# EAGLE board Awesome-Shield-0.50-0.51-Panelized-3x2 (EAGLE 7.2.0)
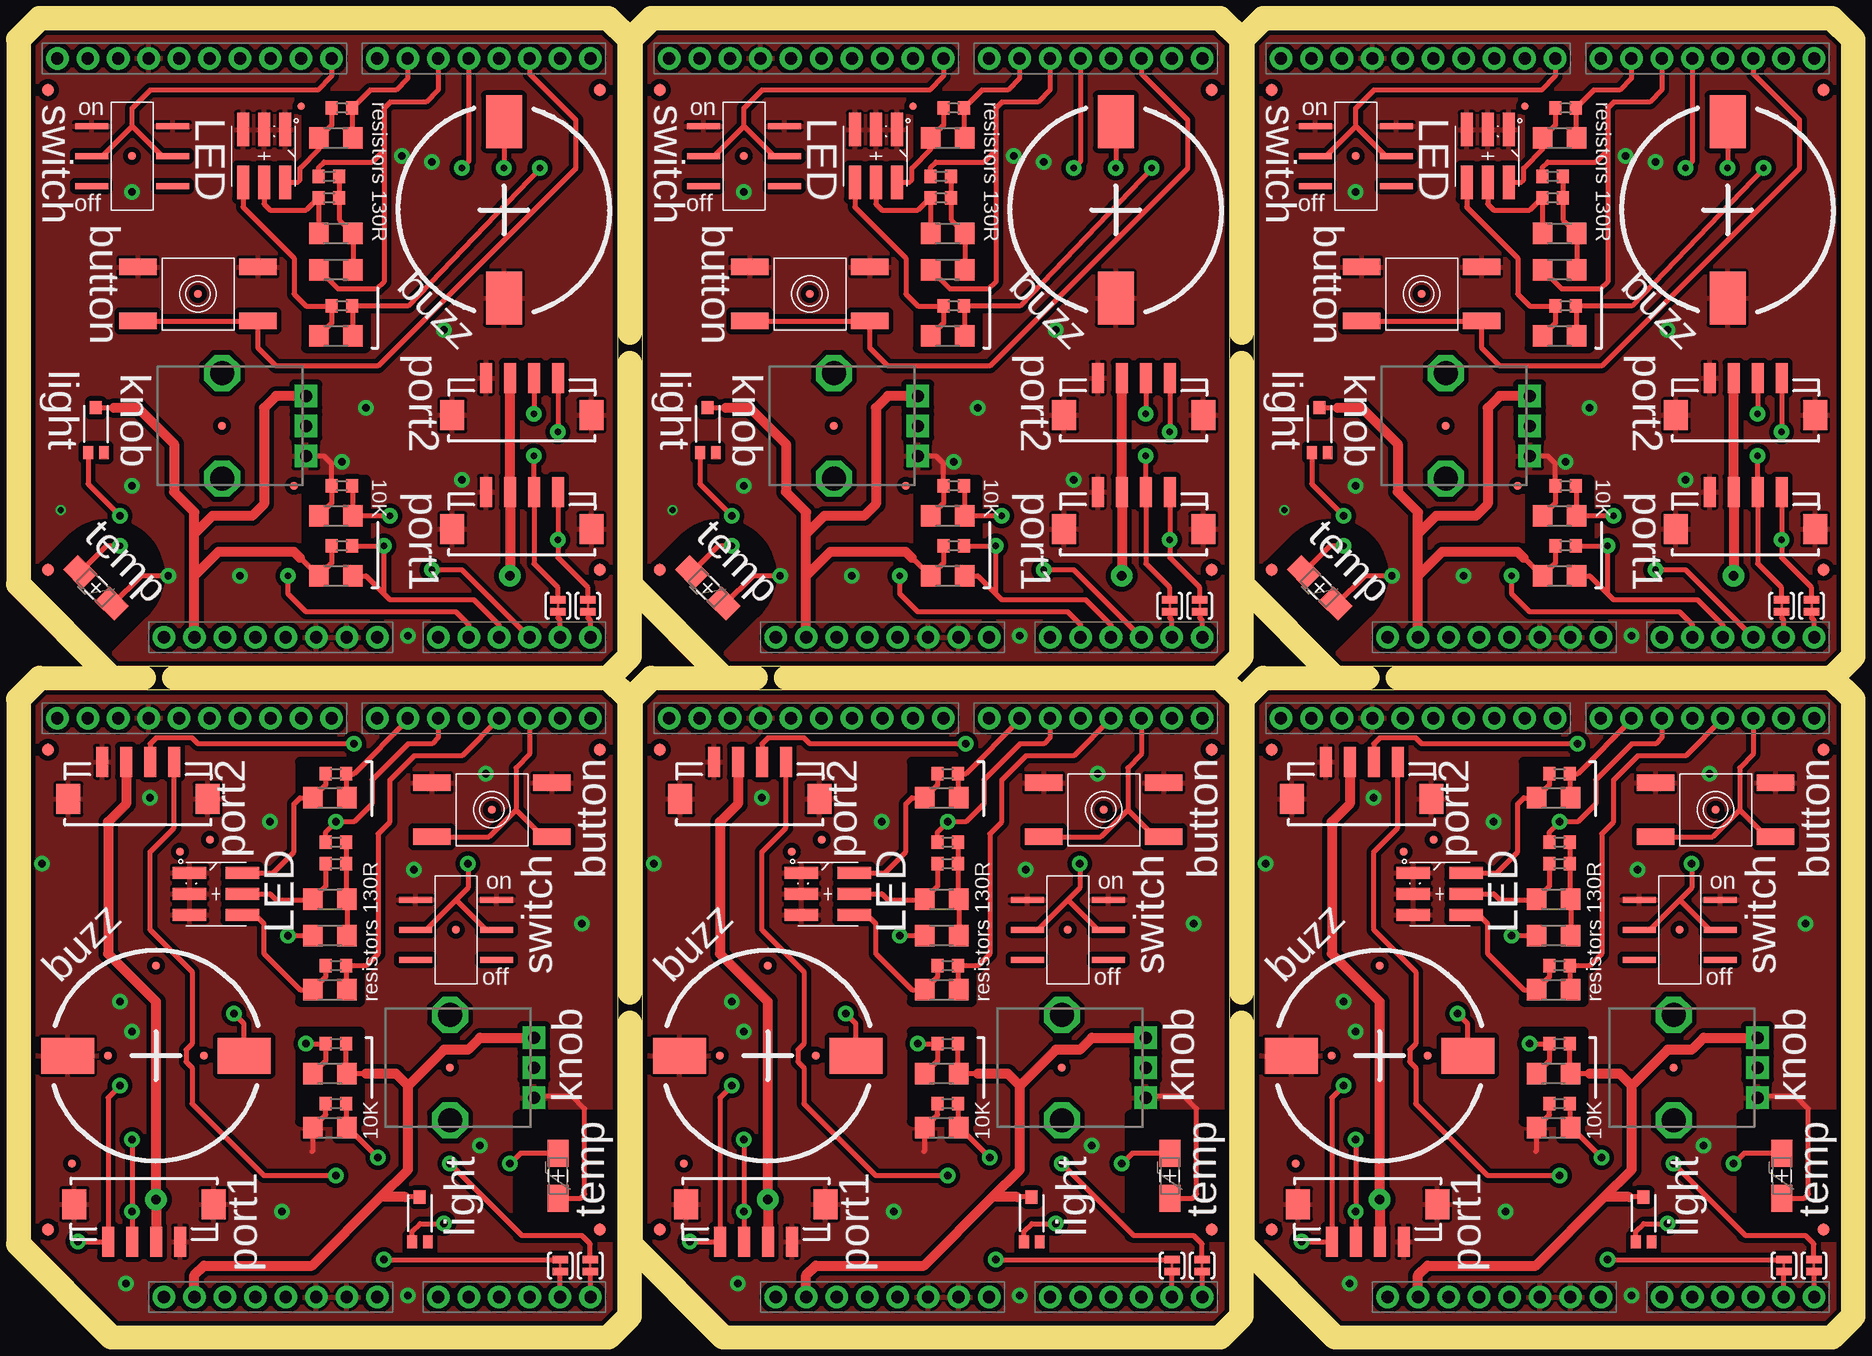
[diagram p0: board, top side]
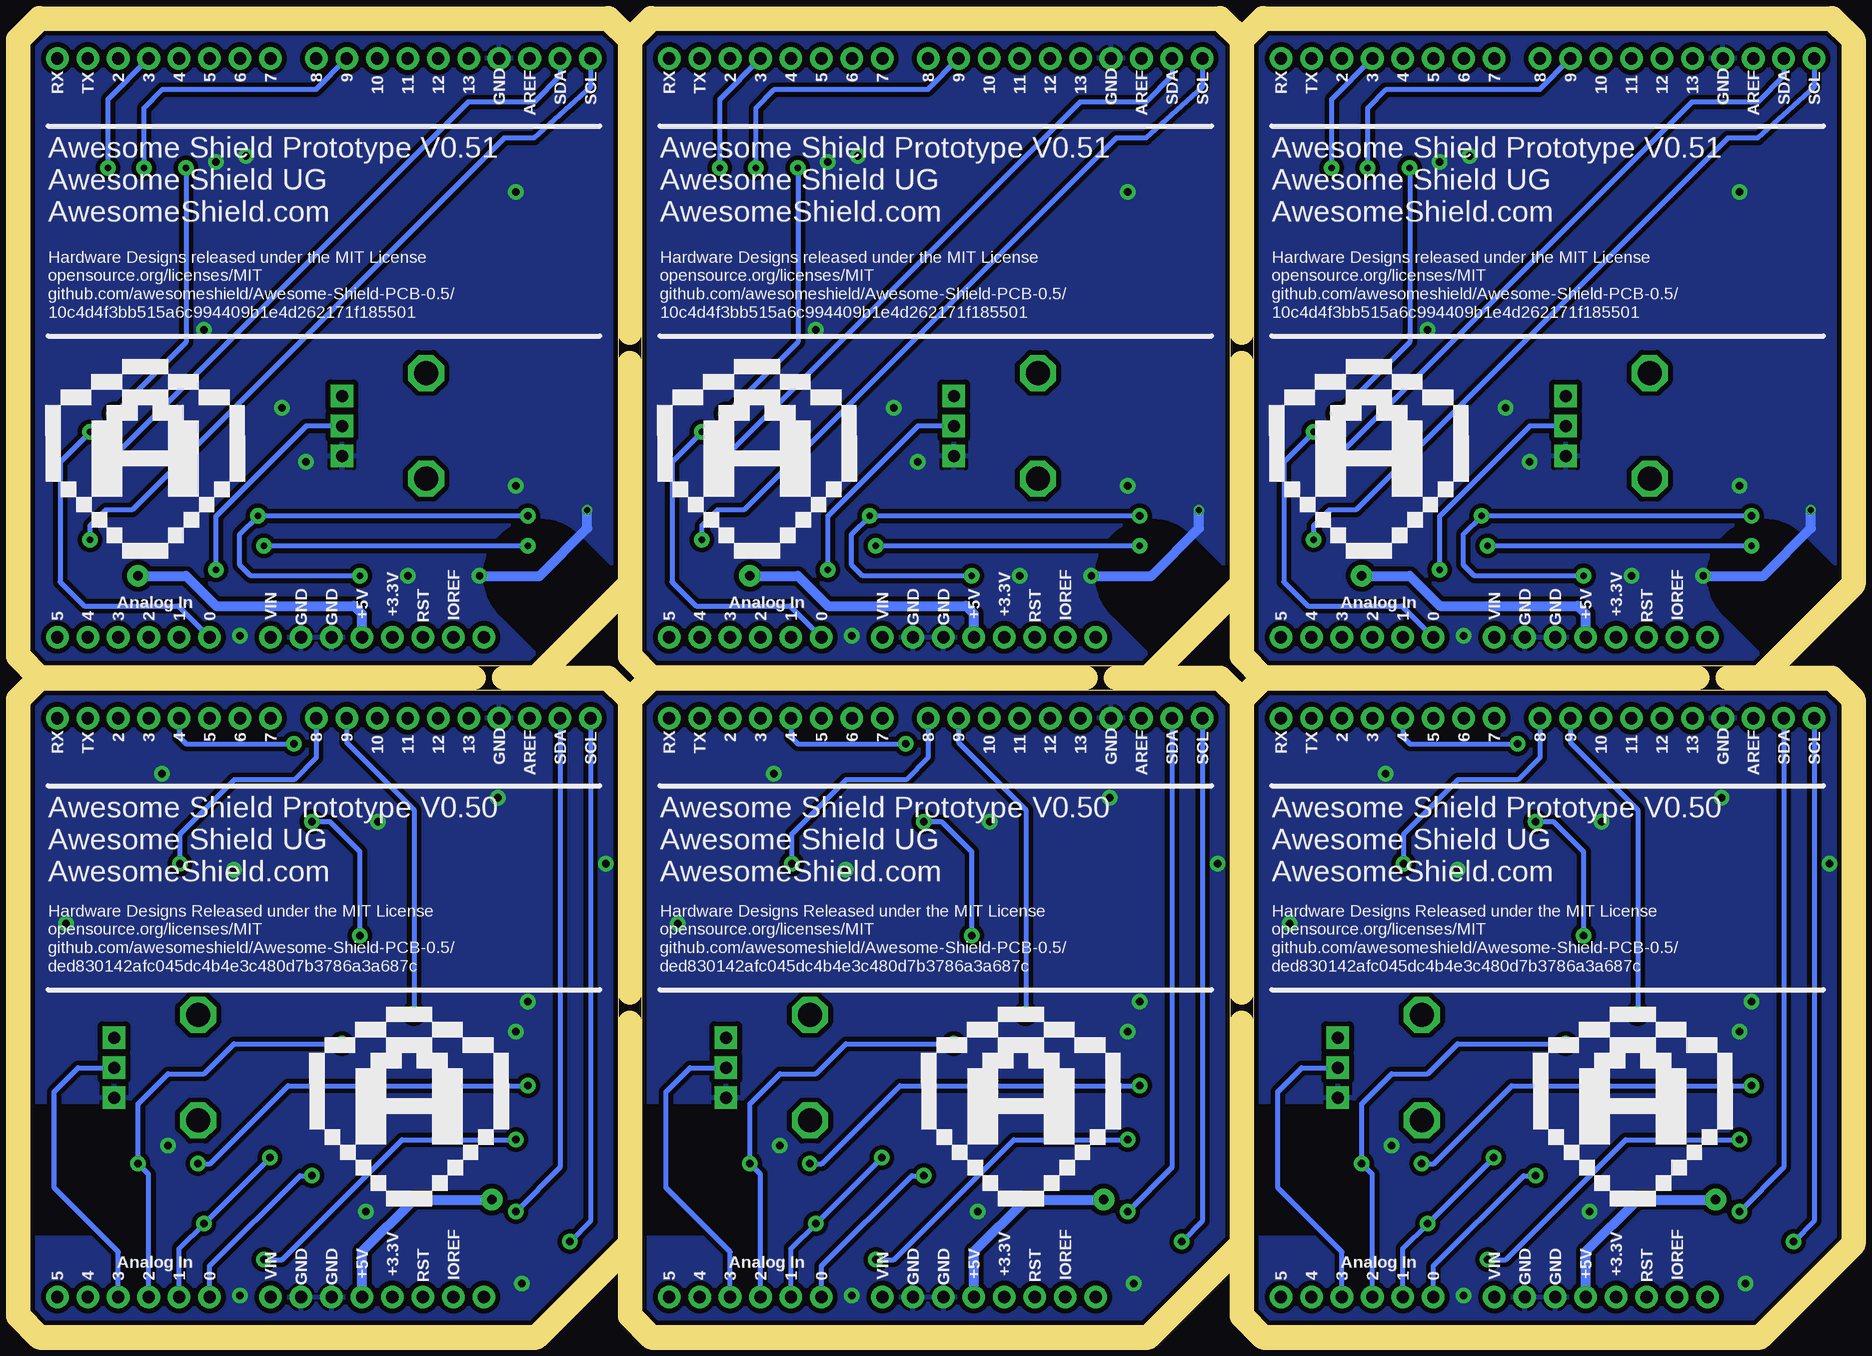
[diagram p1: board, bottom side, seen from below]

Size 151 x 108 mm. Coordinates in mm from the lower left corner, seen from the top.
Outline: 1.2,53 0,51.8 0,7.2 7.2,0 47.8,0 49,1.2 49,51.8 47.8,53 1.2,53
Outline: 103.2,53 102,51.8 102,7.2 109.2,0 149.8,0 151,1.2 151,51.8 149.8,53 103.2,53
Outline: 52.2,53 51,51.8 51,7.2 58.2,0 98.8,0 100,1.2 100,51.8 98.8,53 52.2,53
Outline: 1.2,108 0,106.8 0,62.2 7.2,55 47.8,55 49,56.2 49,106.8 47.8,108 1.2,108
Outline: 52.2,108 51,106.8 51,62.2 58.2,55 98.8,55 100,56.2 100,106.8 98.8,108 52.2,108
Outline: 103.2,108 102,106.8 102,62.2 109.2,55 149.8,55 151,56.2 151,106.8 149.8,108 103.2,108
Copper layers (1*16): Top 0.035mm / dielectric 1.5mm / Bottom 0.035mm
Design rules "SeeedStudio_2layer_DRU_no_angle_20140221": minimum track width 6mil, minimum drill 12mil, track to track 6mil, track to pad 6mil, pad to pad 6mil, via to via 6mil, smd to smd 0mil, copper to edge 10mil, drill to drill 10mil, minimum pad ring 10mil, minimum via ring 6mil, stop-mask expansion 2mil, vias tented up to drill 100mil, thermal gap 10mil
Net classes: 0 default: width 0.203 mm, drill 0.305 mm, clearance 0.152 mm
tRestrict: area 22.5,27 to 27.5,47; area 22.5,17 to 27.5,24.5; area 40.7,7.4 to 48.8,17.6; area 124.5,27 to 129.5,47; area 124.5,17 to 129.5,24.5; area 142.7,7.4 to 150.8,17.6; area 73.5,27 to 78.5,47; area 73.5,17 to 78.5,24.5; area 91.7,7.4 to 99.8,17.6; area 23,81.5 to 28,102.5; area 23,61.5 to 28,70.5; area 0.3,56.3 to 10.6,66.7; 6 more areas
bRestrict: area 42.2,7.9 to 48.8,18.1; area 144.2,7.9 to 150.8,18.1; area 93.2,7.9 to 99.8,18.1; area 0.3,56.3 to 10.6,66.7; area 51.3,56.3 to 61.6,66.7; area 102.3,56.3 to 112.6,66.7
Milling: 55 lines

## Footprints (pad centres in the part's own frame; a part is rotated, then mirrored left to right if it is on the bottom)
PTC-1206 = smd 2.25 x 1.75: 1 -1.875,0; 2 1.875,0
FIDUCIAL-1X2 = smd 1 x 1: 1 0,0
MICRO-FIDUCIAL = smd 0.635 x 0.635: 1 0,0
HW4-SMD-2.0 = smd 1 x 2.5: 1 -3,0; 2 -1,0; 3 1,0; 4 3,0 | smd 2 x 2.5: SS1 -5.8,3.123; SS2 5.8,3.123
UNO_R3_SHIELD = drill 1.016 pad 1.88: 3.3V 50.8,26.67; 5V 50.8,29.21; A0 50.8,41.91; A1 50.8,44.45; A2 50.8,46.99; A3 50.8,49.53; A4 50.8,52.07; A5 50.8,54.61; AREF 2.54,15.24; D2 2.54,49.53; D3 2.54,46.99; D4 2.54,44.45; D5 2.54,41.91; D6 2.54,39.37; D7 2.54,36.83; D8 2.54,33.02; D9 2.54,30.48; D10 2.54,27.94; D11 2.54,25.4; D12 2.54,22.86; D13 2.54,20.32; GND@0 50.8,31.75; GND@1 50.8,34.29; GND@2 2.54,17.78; IOREF 50.8,21.59; NC 50.8,19.05; RES 50.8,24.13; RX 2.54,54.61; SCL 2.54,10.16; SDA 2.54,12.7; TX 2.54,52.07; VIN 50.8,36.83
RGBLED5050 = smd 2.8 x 1: 1 -2.2,1.75; 2 -2.2,0; 3 -2.2,-1.75; 4 2.2,-1.75; 5 2.2,0; 6 2.2,1.75
R1206 = smd 1.6 x 1.803: 1 -1.422,0; 2 1.422,0
R0603 = smd 1 x 1.1: 1 -0.85,0; 2 0.85,0
ALPS_POT = drill 1 pad 1.88 square: P$1 7,-2.5; P$2 7,0; P$3 7,2.5 | drill 2 octagon: P$4 0,-4.4; P$5 0,4.4
AYZ0202 = smd 0.5 x 2.75: 1 -2.5,3.375; 2 0,3.375; 3 2.5,3.375; 4 -2.5,-3.375; 5 0,-3.375; 6 2.5,-3.375
BUZZER-CCV = smd 4.4 x 3: + 7.35,0; - -7.35,0
PAD-JUMPER-2-NC_BY_TRACE_YES_SILK = smd 0.635 x 1.27: 1 -0.508,0; 2 0.508,0
EVQ-Q2 = smd 3.1 x 1.4: A -5,-2.25; A' 5,-2.25; B -5,2.25; B' 5,2.25
TEMT6000-SEN = smd 1.1 x 0.8: BASE -1.87,-0.65; EMITTER -1.87,0.65 | smd 1.1 x 1: COLLECTOR 1.86,0.01

## Placement (x,y rotation side)
F1  PTCTHERMISTOR1206  [PTC-1206]  44,12.5 90 top
F2  PTCTHERMISTOR1206  [PTC-1206]  146,12.5 90 top
F3  PTCTHERMISTOR1206  [PTC-1206]  95,12.5 90 top
F4  PTCTHERMISTOR1206  [PTC-1206]  5.5,61.5 135 top
F5  PTCTHERMISTOR1206  [PTC-1206]  56.5,61.5 135 top
F6  PTCTHERMISTOR1206  [PTC-1206]  107.5,61.5 135 top
FID1  FIDUCIAL1X2  [FIDUCIAL-1X2]  1.5,8 0 top
FID2  FIDUCIAL1X2  [FIDUCIAL-1X2]  47.5,48 0 top
FID3  FIDUCIAL1X2  [FIDUCIAL-1X2]  47.5,8 0 top
FID4  FIDUCIAL1X2  [FIDUCIAL-1X2]  1.5,48 0 top
FID5  FIDUCIALUFIDUCIAL  [MICRO-FIDUCIAL]  3.5,13.5 0 top
FID6  FIDUCIALUFIDUCIAL  [MICRO-FIDUCIAL]  12.5,39.5 0 top
FID7  FIDUCIALUFIDUCIAL  [MICRO-FIDUCIAL]  38.5,43 0 top
FID8  FIDUCIALUFIDUCIAL  [MICRO-FIDUCIAL]  14.5,22.5 0 top
FID9  FIDUCIALUFIDUCIAL  [MICRO-FIDUCIAL]  10.5,30 0 top
FID10  FIDUCIALUFIDUCIAL  [MICRO-FIDUCIAL]  6.5,22.5 0 top
FID11  FIDUCIALUFIDUCIAL  [MICRO-FIDUCIAL]  35,21.5 0 top
FID12  FIDUCIAL1X2  [FIDUCIAL-1X2]  103.5,8 0 top
FID13  FIDUCIALUFIDUCIAL  [MICRO-FIDUCIAL]  35.5,33 0 top
FID14  FIDUCIAL1X2  [FIDUCIAL-1X2]  149.5,48 0 top
FID15  FIDUCIALUFIDUCIAL  [MICRO-FIDUCIAL]  15,40.5 0 top
FID16  FIDUCIAL1X2  [FIDUCIAL-1X2]  149.5,8 0 top
FID17  FIDUCIAL1X2  [FIDUCIAL-1X2]  103.5,48 0 top
FID18  FIDUCIALUFIDUCIAL  [MICRO-FIDUCIAL]  105.5,13.5 0 top
FID19  FIDUCIALUFIDUCIAL  [MICRO-FIDUCIAL]  114.5,39.5 0 top
FID20  FIDUCIALUFIDUCIAL  [MICRO-FIDUCIAL]  140.5,43 0 top
FID21  FIDUCIALUFIDUCIAL  [MICRO-FIDUCIAL]  116.5,22.5 0 top
FID22  FIDUCIALUFIDUCIAL  [MICRO-FIDUCIAL]  112.5,30 0 top
FID23  FIDUCIALUFIDUCIAL  [MICRO-FIDUCIAL]  108.5,22.5 0 top
FID24  FIDUCIALUFIDUCIAL  [MICRO-FIDUCIAL]  137,21.5 0 top
FID25  FIDUCIALUFIDUCIAL  [MICRO-FIDUCIAL]  137.5,33 0 top
FID26  FIDUCIALUFIDUCIAL  [MICRO-FIDUCIAL]  117,40.5 0 top
FID27  FIDUCIAL1X2  [FIDUCIAL-1X2]  52.5,8 0 top
FID28  FIDUCIAL1X2  [FIDUCIAL-1X2]  98.5,48 0 top
FID29  FIDUCIAL1X2  [FIDUCIAL-1X2]  98.5,8 0 top
FID30  FIDUCIAL1X2  [FIDUCIAL-1X2]  52.5,48 0 top
FID31  FIDUCIALUFIDUCIAL  [MICRO-FIDUCIAL]  54.5,13.5 0 top
FID32  FIDUCIALUFIDUCIAL  [MICRO-FIDUCIAL]  63.5,39.5 0 top
FID33  FIDUCIALUFIDUCIAL  [MICRO-FIDUCIAL]  89.5,43 0 top
FID34  FIDUCIALUFIDUCIAL  [MICRO-FIDUCIAL]  65.5,22.5 0 top
FID35  FIDUCIALUFIDUCIAL  [MICRO-FIDUCIAL]  61.5,30 0 top
FID36  FIDUCIALUFIDUCIAL  [MICRO-FIDUCIAL]  57.5,22.5 0 top
FID37  FIDUCIALUFIDUCIAL  [MICRO-FIDUCIAL]  86,21.5 0 top
FID38  FIDUCIALUFIDUCIAL  [MICRO-FIDUCIAL]  86.5,33 0 top
FID39  FIDUCIALUFIDUCIAL  [MICRO-FIDUCIAL]  66,40.5 0 top
FID40  FIDUCIAL1X2  [FIDUCIAL-1X2]  1.5,63 0 top
FID41  FIDUCIAL1X2  [FIDUCIAL-1X2]  47.5,103 0 top
FID42  FIDUCIAL1X2  [FIDUCIAL-1X2]  47.5,63 0 top
FID43  FIDUCIAL1X2  [FIDUCIAL-1X2]  1.5,103 0 top
FID44  FIDUCIALUFIDUCIAL  [MICRO-FIDUCIAL]  14,86 0 top
FID45  FIDUCIALUFIDUCIAL  [MICRO-FIDUCIAL]  8.5,97.5 0 top
FID46  FIDUCIALUFIDUCIAL  [MICRO-FIDUCIAL]  22.6,101.63 0 top
FID47  FIDUCIALUFIDUCIAL  [MICRO-FIDUCIAL]  22,70 0 top
FID48  FIDUCIALUFIDUCIAL  [MICRO-FIDUCIAL]  16,75 0 top
FID49  FIDUCIAL1X2  [FIDUCIAL-1X2]  52.5,63 0 top
FID50  FIDUCIAL1X2  [FIDUCIAL-1X2]  98.5,103 0 top
FID51  FIDUCIAL1X2  [FIDUCIAL-1X2]  98.5,63 0 top
FID52  FIDUCIAL1X2  [FIDUCIAL-1X2]  52.5,103 0 top
FID53  FIDUCIALUFIDUCIAL  [MICRO-FIDUCIAL]  65,86 0 top
FID54  FIDUCIALUFIDUCIAL  [MICRO-FIDUCIAL]  59.5,97.5 0 top
FID55  FIDUCIALUFIDUCIAL  [MICRO-FIDUCIAL]  73.6,101.63 0 top
FID56  FIDUCIALUFIDUCIAL  [MICRO-FIDUCIAL]  73,70 0 top
FID57  FIDUCIALUFIDUCIAL  [MICRO-FIDUCIAL]  67,75 0 top
FID58  FIDUCIAL1X2  [FIDUCIAL-1X2]  103.5,63 0 top
FID59  FIDUCIAL1X2  [FIDUCIAL-1X2]  149.5,103 0 top
FID60  FIDUCIAL1X2  [FIDUCIAL-1X2]  149.5,63 0 top
FID61  FIDUCIAL1X2  [FIDUCIAL-1X2]  103.5,103 0 top
FID62  FIDUCIALUFIDUCIAL  [MICRO-FIDUCIAL]  116,86 0 top
FID63  FIDUCIALUFIDUCIAL  [MICRO-FIDUCIAL]  110.5,97.5 0 top
FID64  FIDUCIALUFIDUCIAL  [MICRO-FIDUCIAL]  124.6,101.63 0 top
FID65  FIDUCIALUFIDUCIAL  [MICRO-FIDUCIAL]  124,70 0 top
FID66  FIDUCIALUFIDUCIAL  [MICRO-FIDUCIAL]  118,75 0 top
J1  [HW4-SMD-2.0]  111.5,7 0 top
J2  ARDUINO_R3_SHIELD  [UNO_R3_SHIELD]  -7.89,53.17 270 top
J3  [HW4-SMD-2.0]  9.5,7 0 top
J4  [HW4-SMD-2.0]  9,47 180 top
J5  [HW4-SMD-2.0]  111,47 180 top
J6  ARDUINO_R3_SHIELD  [UNO_R3_SHIELD]  94.11,53.17 270 top
J7  [HW4-SMD-2.0]  60.5,7 0 top
J8  [HW4-SMD-2.0]  60,47 180 top
J9  ARDUINO_R3_SHIELD  [UNO_R3_SHIELD]  43.11,53.17 270 top
J10  [HW4-SMD-2.0]  41,69.5 180 top
J11  [HW4-SMD-2.0]  41,79 180 top
J12  ARDUINO_R3_SHIELD  [UNO_R3_SHIELD]  -7.89,108.17 270 top
J13  [HW4-SMD-2.0]  92,69.5 180 top
J14  [HW4-SMD-2.0]  92,79 180 top
J15  ARDUINO_R3_SHIELD  [UNO_R3_SHIELD]  43.11,108.17 270 top
J16  [HW4-SMD-2.0]  143,69.5 180 top
J17  [HW4-SMD-2.0]  143,79 180 top
J18  ARDUINO_R3_SHIELD  [UNO_R3_SHIELD]  94.11,108.17 270 top
LED1  RGBLED5050  [RGBLED5050]  15.5,36 180 top
LED2  RGBLED5050  [RGBLED5050]  117.5,36 180 top
LED3  RGBLED5050  [RGBLED5050]  66.5,36 180 top
LED4  RGBLED5050  [RGBLED5050]  19.5,97.5 90 top
LED5  RGBLED5050  [RGBLED5050]  70.5,97.5 90 top
LED6  RGBLED5050  [RGBLED5050]  121.5,97.5 90 top
R1  130 Ohm  [R1206]  25,44 180 top
R2  130 Ohm  [R1206]  25,28 180 top
R3  130 Ohm  [R1206]  25,35.55 180 top
R4  130 Ohm  [R1206]  25,32.5 0 top
R5  130 Ohm  [R0603]  25.5,30 180 top
R6  10K  [R1206]  25,16.5 180 top
R7  10K Ohm  [R1206]  25,21 0 top
R8  130 Ohm  [R0603]  25.5,46 180 top
R9  130 Ohm  [R0603]  25.5,38.5 180 top
R10  130 Ohm  [R0603]  25.5,40.3 0 top
R11  10K  [R0603]  25.5,18.5 0 top
R12  10K Ohm  [R0603]  25.5,23.5 0 top
R13  130 Ohm  [R1206]  127,44 180 top
R14  130 Ohm  [R1206]  127,28 180 top
R15  130 Ohm  [R1206]  127,35.55 180 top
R16  10K  [R1206]  127,16.5 180 top
R17  10K Ohm  [R1206]  127,21 0 top
R18  130 Ohm  [R1206]  127,32.5 0 top
R19  130 Ohm  [R0603]  127.5,46 180 top
R20  130 Ohm  [R0603]  127.5,30 180 top
R21  130 Ohm  [R0603]  127.5,38.5 180 top
R22  130 Ohm  [R0603]  127.5,40.3 0 top
R23  10K  [R0603]  127.5,18.5 0 top
R24  10K Ohm  [R0603]  127.5,23.5 0 top
R25  130 Ohm  [R1206]  76,44 180 top
R26  130 Ohm  [R1206]  76,28 180 top
R27  130 Ohm  [R1206]  76,35.55 180 top
R28  10K  [R1206]  76,16.5 180 top
R29  10K Ohm  [R1206]  76,21 0 top
R30  130 Ohm  [R1206]  76,32.5 0 top
R31  130 Ohm  [R0603]  76.5,46 180 top
R32  130 Ohm  [R0603]  76.5,30 180 top
R33  130 Ohm  [R0603]  76.5,38.5 180 top
R34  130 Ohm  [R0603]  76.5,40.3 0 top
R35  10K  [R0603]  76.5,18.5 0 top
R36  10K Ohm  [R0603]  76.5,23.5 0 top
R37  130 Ohm  [R1206]  25.5,99 180 top
R38  130 Ohm  [R1206]  25.5,82.5 180 top
R39  130 Ohm  [R1206]  25.5,91.05 180 top
R40  10K  [R1206]  25.5,67.5 180 top
R41  10K Ohm  [R1206]  25.5,62.5 180 top
R42  130 Ohm  [R1206]  25.5,88 0 top
R43  130 Ohm  [R0603]  26,101.5 180 top
R44  130 Ohm  [R0603]  26,85 180 top
R45  130 Ohm  [R0603]  24.93,94 180 top
R46  130 Ohm  [R0603]  24.93,95.8 0 top
R47  10K  [R0603]  26,70 0 top
R48  10K Ohm  [R0603]  26,65 180 top
R49  130 Ohm  [R1206]  76.5,99 180 top
R50  130 Ohm  [R1206]  76.5,82.5 180 top
R51  130 Ohm  [R1206]  76.5,91.05 180 top
R52  10K  [R1206]  76.5,67.5 180 top
R53  10K Ohm  [R1206]  76.5,62.5 180 top
R54  130 Ohm  [R1206]  76.5,88 0 top
R55  130 Ohm  [R0603]  77,101.5 180 top
R56  130 Ohm  [R0603]  77,85 180 top
R57  130 Ohm  [R0603]  75.93,94 180 top
R58  130 Ohm  [R0603]  75.93,95.8 0 top
R59  10K  [R0603]  77,70 0 top
R60  10K Ohm  [R0603]  77,65 180 top
R61  130 Ohm  [R1206]  127.5,99 180 top
R62  130 Ohm  [R1206]  127.5,82.5 180 top
R63  130 Ohm  [R1206]  127.5,91.05 180 top
R64  10K  [R1206]  127.5,67.5 180 top
R65  10K Ohm  [R1206]  127.5,62.5 180 top
R66  130 Ohm  [R1206]  127.5,88 0 top
R67  130 Ohm  [R0603]  128,101.5 180 top
R68  130 Ohm  [R0603]  128,85 180 top
R69  130 Ohm  [R0603]  126.93,94 180 top
R70  130 Ohm  [R0603]  126.93,95.8 0 top
R71  10K  [R0603]  128,70 0 top
R72  10K Ohm  [R0603]  128,65 180 top
RV1  [ALPS_POT]  35,21.5 0 top
RV2  [ALPS_POT]  137,21.5 0 top
RV3  [ALPS_POT]  86,21.5 0 top
RV4  [ALPS_POT]  16,75 0 top
RV5  [ALPS_POT]  67,75 0 top
RV6  [ALPS_POT]  118,75 0 top
S1  DPDT  [AYZ0202]  137.5,33 90 top
S2  DPDT  [AYZ0202]  35.5,33 90 top
S3  DPDT  [AYZ0202]  86.5,33 90 top
S4  DPDT  [AYZ0202]  8.5,97.5 90 top
S5  DPDT  [AYZ0202]  59.5,97.5 90 top
S6  DPDT  [AYZ0202]  110.5,97.5 90 top
SG1  BUZZERSMD2  [BUZZER-CCV]  10.5,22.5 180 top
SG2  BUZZERSMD2  [BUZZER-CCV]  112.5,22.5 180 top
SG3  BUZZERSMD2  [BUZZER-CCV]  61.5,22.5 180 top
SG4  BUZZERSMD2  [BUZZER-CCV]  39.5,93 270 top
SG5  BUZZERSMD2  [BUZZER-CCV]  90.5,93 270 top
SG6  BUZZERSMD2  [BUZZER-CCV]  141.5,93 270 top
SJ1  JUMPER-PAD-2-NC_BY_TRACE  [PAD-JUMPER-2-NC_BY_TRACE_YES_SILK]  44.2,5 270 top
SJ2  JUMPER-PAD-2-NC_BY_TRACE  [PAD-JUMPER-2-NC_BY_TRACE_YES_SILK]  46.7,5 270 top
SJ3  JUMPER-PAD-2-NC_BY_TRACE  [PAD-JUMPER-2-NC_BY_TRACE_YES_SILK]  146.2,5 270 top
SJ4  JUMPER-PAD-2-NC_BY_TRACE  [PAD-JUMPER-2-NC_BY_TRACE_YES_SILK]  148.7,5 270 top
SJ5  JUMPER-PAD-2-NC_BY_TRACE  [PAD-JUMPER-2-NC_BY_TRACE_YES_SILK]  95.2,5 270 top
SJ6  JUMPER-PAD-2-NC_BY_TRACE  [PAD-JUMPER-2-NC_BY_TRACE_YES_SILK]  97.7,5 270 top
SJ7  JUMPER-PAD-2-NC_BY_TRACE  [PAD-JUMPER-2-NC_BY_TRACE_YES_SILK]  44,60 270 top
SJ8  JUMPER-PAD-2-NC_BY_TRACE  [PAD-JUMPER-2-NC_BY_TRACE_YES_SILK]  46.5,60 270 top
SJ9  JUMPER-PAD-2-NC_BY_TRACE  [PAD-JUMPER-2-NC_BY_TRACE_YES_SILK]  95,60 270 top
SJ10  JUMPER-PAD-2-NC_BY_TRACE  [PAD-JUMPER-2-NC_BY_TRACE_YES_SILK]  97.5,60 270 top
SJ11  JUMPER-PAD-2-NC_BY_TRACE  [PAD-JUMPER-2-NC_BY_TRACE_YES_SILK]  146,60 270 top
SJ12  JUMPER-PAD-2-NC_BY_TRACE  [PAD-JUMPER-2-NC_BY_TRACE_YES_SILK]  148.5,60 270 top
SW1  SPST_TACT-EVQQ2  [EVQ-Q2]  38.5,43 180 top
SW2  SPST_TACT-EVQQ2  [EVQ-Q2]  140.5,43 180 top
SW3  SPST_TACT-EVQQ2  [EVQ-Q2]  89.5,43 180 top
SW4  SPST_TACT-EVQQ2  [EVQ-Q2]  14,86 180 top
SW5  SPST_TACT-EVQQ2  [EVQ-Q2]  65,86 180 top
SW6  SPST_TACT-EVQQ2  [EVQ-Q2]  116,86 180 top
U1  LIGHTSENSORTEMT6000  [TEMT6000-SEN]  32.5,8.85 90 top
U2  LIGHTSENSORTEMT6000  [TEMT6000-SEN]  134.5,8.85 90 top
U3  LIGHTSENSORTEMT6000  [TEMT6000-SEN]  83.5,8.85 90 top
U4  LIGHTSENSORTEMT6000  [TEMT6000-SEN]  5.5,74.65 90 top
U5  LIGHTSENSORTEMT6000  [TEMT6000-SEN]  56.5,74.65 90 top
U6  LIGHTSENSORTEMT6000  [TEMT6000-SEN]  107.5,74.65 90 top

## Library data of the parts
F1-F6 = SparkFun-PowerIC; PROD_ID: RES-08585
FID1-FID66 = SparkFun-Aesthetics
J1 J3-J5 J7 J8 J10 J11 J13 J14 J16 J17 = Seeed-OPL-Connector
J2 J6 J9 J12 J15 J18 = SparkFun-Boards
LED1-LED6 SW1-SW6 = adafruit
R1-R72 = rcl
RV1-RV6 = SparkFun-Electromechanical; PROD_ID: RES-09177
S1-S6 = SparkFun-Electromechanical; PROD_ID: SWCH-08179
SG1-SG6 = SparkFun-Electromechanical
SJ1-SJ12 = SparkFun-Passives
U1-U6 = SparkFun-Sensors

## Nets
+3V1: J6.3.3V
+3V2: J9.3.3V
+3V3: J2.3.3V
+3V4: J12.3.3V
+3V5: J15.3.3V
+3V6: J18.3.3V
+5V: J2.5V J3.3 J4.3
+5V1: J1.3 J5.3 J6.5V
+5V2: J7.3 J8.3 J9.5V
+5V3: J10.3 J11.3 J12.5V
+5V4: J13.3 J14.3 J15.5V
+5V5: J16.3 J17.3 J18.5V
A0: J2.A0 J4.1
A1: J2.A1 R6.1 R11.2 U1.EMITTER
A2: F1.2 J2.A2 R7.1 R12.1
A3: J2.A3 RV1.P$2
A4: J2.A4 SJ1.2
A5: J2.A5 SJ2.2
A6: J6.A1 R16.1 R23.2 U2.EMITTER
A7: F2.2 J6.A2 R17.1 R24.1
A8: J5.1 J6.A0
A9: J6.A5 SJ4.2
A10: J6.A4 SJ3.2
A11: J6.A3 RV2.P$2
A12: J9.A1 R28.1 R35.2 U3.EMITTER
A13: F3.2 J9.A2 R29.1 R36.1
A14: J8.1 J9.A0
A15: J9.A5 SJ6.2
A16: J9.A4 SJ5.2
A17: J9.A3 RV3.P$2
A18: J12.A1 R40.1 R47.2 U4.EMITTER
A19: F4.2 J12.A2 R41.1 R48.1
A20: J11.1 J12.A0
A21: J12.A5 SJ8.2
A22: J12.A4 SJ7.2
A23: J12.A3 RV4.P$2
A24: J15.A1 R52.1 R59.2 U5.EMITTER
A25: F5.2 J15.A2 R53.1 R60.1
A26: J14.1 J15.A0
A27: J15.A5 SJ10.2
A28: J15.A4 SJ9.2
A29: J15.A3 RV5.P$2
A30: J18.A1 R64.1 R71.2 U6.EMITTER
A31: F6.2 J18.A2 R65.1 R72.1
A32: J17.1 J18.A0
A33: J18.A5 SJ12.2
A34: J18.A4 SJ11.2
A35: J18.A3 RV6.P$2
D1: J6.D2 SW2.B SW2.B'
D2: J2.D2 SW1.B SW1.B'
D3: J2.D3 R2.1 R5.1
D4: J2.D4 J4.2
D5: J2.D5 R4.1 R10.1
D6: J2.D6 R1.1 R8.1
D7: J6.D6 R13.1 R19.1
D8: J2.D8 S2.2 S2.5
D9: J2.D9 SG1.-
D10: J6.D8 S1.2 S1.5
D11: J6.D9 SG2.-
D12: J5.2 J6.D4
D13: J6.D5 R18.1 R22.1
D14: J6.D3 R14.1 R20.1
D15: J9.D2 SW3.B SW3.B'
D16: J9.D6 R25.1 R31.1
D17: J9.D8 S3.2 S3.5
D18: J9.D9 SG3.-
D19: J8.2 J9.D4
D20: J9.D5 R30.1 R34.1
D21: J9.D3 R26.1 R32.1
D22: J12.D2 SW4.B SW4.B'
D23: J12.D6 R37.1 R43.1
D24: J12.D8 S4.2 S4.5
D25: J12.D9 SG4.-
D26: J11.2 J12.D4
D27: J12.D5 R42.1 R46.1
D28: J12.D3 R38.1 R44.1
D29: J15.D2 SW5.B SW5.B'
D30: J15.D6 R49.1 R55.1
D31: J15.D8 S5.2 S5.5
D32: J15.D9 SG5.-
D33: J14.2 J15.D4
D34: J15.D5 R54.1 R58.1
D35: J15.D3 R50.1 R56.1
D36: J18.D2 SW6.B SW6.B'
D37: J18.D6 R61.1 R67.1
D38: J18.D8 S6.2 S6.5
D39: J18.D9 SG6.-
D40: J17.2 J18.D4
D41: J18.D5 R66.1 R70.1
D42: J18.D3 R62.1 R68.1
GND: F1.1 J2.GND@0 J2.GND@1 J2.GND@2 J3.4 J3.SS1 J3.SS2 J4.4 J4.SS1 J4.SS2 LED1.4 LED1.5 LED1.6 R6.2 R11.1 RV1.P$1 S2.3 S2.6 SG1.+ SW1.A SW1.A'
GND1: F2.1 J1.4 J1.SS1 J1.SS2 J5.4 J5.SS1 J5.SS2 J6.GND@0 J6.GND@1 J6.GND@2 LED2.4 LED2.5 LED2.6 R16.2 R23.1 RV2.P$1 S1.3 S1.6 SG2.+ SW2.A SW2.A'
GND2: F3.1 J7.4 J7.SS1 J7.SS2 J8.4 J8.SS1 J8.SS2 J9.GND@0 J9.GND@1 J9.GND@2 LED3.4 LED3.5 LED3.6 R28.2 R35.1 RV3.P$1 S3.3 S3.6 SG3.+ SW3.A SW3.A'
GND3: F4.1 J10.4 J10.SS1 J10.SS2 J11.4 J11.SS1 J11.SS2 J12.GND@0 J12.GND@1 J12.GND@2 LED4.4 LED4.5 LED4.6 R40.2 R47.1 RV4.P$1 S4.3 S4.6 SG4.+ SW4.A SW4.A'
GND4: F5.1 J13.4 J13.SS1 J13.SS2 J14.4 J14.SS1 J14.SS2 J15.GND@0 J15.GND@1 J15.GND@2 LED5.4 LED5.5 LED5.6 R52.2 R59.1 RV5.P$1 S5.3 S5.6 SG5.+ SW5.A SW5.A'
GND5: F6.1 J16.4 J16.SS1 J16.SS2 J17.4 J17.SS1 J17.SS2 J18.GND@0 J18.GND@1 J18.GND@2 LED6.4 LED6.5 LED6.6 R64.2 R71.1 RV6.P$1 S6.3 S6.6 SG6.+ SW6.A SW6.A'
IOREF: J2.IOREF R7.2 R12.2 RV1.P$3 U1.COLLECTOR
IOREF1: J6.IOREF R17.2 R24.2 RV2.P$3 U2.COLLECTOR
IOREF2: J9.IOREF R29.2 R36.2 RV3.P$3 U3.COLLECTOR
IOREF3: J12.IOREF R41.2 R48.2 RV4.P$3 U4.COLLECTOR
IOREF4: J15.IOREF R53.2 R60.2 RV5.P$3 U5.COLLECTOR
IOREF5: J18.IOREF R65.2 R72.2 RV6.P$3 U6.COLLECTOR
N$1: LED2.2 R15.2 R21.2
N$2: R3.1 R4.2 R9.1 R10.2
N$3: LED1.2 R3.2 R9.2
N$4: R15.1 R18.2 R21.1 R22.2
N$5: LED2.3 R13.2 R19.2
N$6: LED2.1 R14.2 R20.2
N$7: LED3.2 R27.2 R33.2
N$8: LED1.3 R1.2 R8.2
N$9: LED1.1 R2.2 R5.2
N$10: R27.1 R30.2 R33.1 R34.2
N$11: LED3.3 R25.2 R31.2
N$12: LED3.1 R26.2 R32.2
N$13: LED4.2 R39.2 R45.2
N$14: R39.1 R42.2 R45.1 R46.2
N$15: LED4.3 R37.2 R43.2
N$16: LED4.1 R38.2 R44.2
N$17: LED5.2 R51.2 R57.2
N$18: R51.1 R54.2 R57.1 R58.2
N$19: LED5.3 R49.2 R55.2
N$20: LED5.1 R50.2 R56.2
N$21: LED6.2 R63.2 R69.2
N$22: R63.1 R66.2 R69.1 R70.2
N$23: LED6.3 R61.2 R67.2
N$24: LED6.1 R62.2 R68.2
SCL: J2.SCL J3.1 SJ2.1
SCL1: J1.1 J6.SCL SJ4.1
SCL2: J7.1 J9.SCL SJ6.1
SCL3: J10.1 J12.SCL SJ8.1
SCL4: J13.1 J15.SCL SJ10.1
SCL5: J16.1 J18.SCL SJ12.1
SDA: J2.SDA J3.2 SJ1.1
SDA1: J1.2 J6.SDA SJ3.1
SDA2: J7.2 J9.SDA SJ5.1
SDA3: J10.2 J12.SDA SJ7.1
SDA4: J13.2 J15.SDA SJ9.1
SDA5: J16.2 J18.SDA SJ11.1

## Tracks (layer width: path | path; a pad name or v marks a point on that pad's centre or on a via)
+5V  (via drill 0.76 pad 1.78)
  Top 0.813: J3.3 v10.5,10.5 10.5,27 6.5,31 6.5,42 8,43.5 J4.3
  Bottom 0.813: J2.5V 21.33,6.18 17,10.5 v10.5,10.5
+5V1  (via drill 0.76 pad 1.78)
  Top 0.813: J1.3 v112.5,10.5 112.5,27 108.5,31 108.5,42 110,43.5 J5.3
  Bottom 0.813: J6.5V 123.32,6.18 119,10.5 v112.5,10.5
+5V2  (via drill 0.76 pad 1.78)
  Top 0.813: J7.3 v61.5,10.5 61.5,27 57.5,31 57.5,42 59,43.5 J8.3
  Bottom 0.813: J9.5V 72.33,6.18 68,10.5 v61.5,10.5
+5V3  (via drill 0.76 pad 1.78)
  Top 0.813: J11.3 J10.3 v40,62.5
  Bottom 0.813: v40,62.5 36,62.5 33.5,60 22,60 21.33,59.33 J12.5V
+5V4  (via drill 0.76 pad 1.78)
  Top 0.813: J14.3 J13.3 v91,62.5
  Bottom 0.813: v91,62.5 87,62.5 84.5,60 73,60 72.33,59.33 J15.5V
+5V5  (via drill 0.76 pad 1.78)
  Top 0.813: J17.3 J16.3 v142,62.5
  Bottom 0.813: v142,62.5 138,62.5 135.5,60 124,60 123.32,59.33 J18.5V
A0  (via drill 0.6 pad 1.27)
  Top 0.406: J4.1 12,41.5 10,39.5 10,33 13.5,29.5 13.5,23.5 13,23 13,22 13.5,21.5 13.5,18.5 19.5,12.5 v25.5,12.5
  Bottom 0.406: J2.A0 34.03,4.98 26.5,12.5 v25.5,12.5
A1  (via drill 0.6 pad 1.27)
  Top 0.406: R11.2 26.35,16.57 R6.1 26.5,16.5 v29,14 | U1.EMITTER 31.85,7.85 32.5,8.5 v34.5,8.5
  Bottom 0.406: J2.A1 36.56,6.43 v34.5,8.5 v29,14
A2  (via drill 0.6 pad 1.27)
  Top 0.406: F1.2 40.88,14.38 v40,13.5 | v23,23.5 R12.1 24.65,22.07 R7.1
  Bottom 0.406: v23,23.5 32,23.5 34.5,21 37.5,21 40,18.5 v40,13.5 39.11,12.61 J2.A2
A3
  Bottom 0.406: J2.A3 41.64,6.14 47,11.5 47,19.5 45,21.5 RV1.P$2
A4
  Top 0.406: J2.A4 44.19,4.48 SJ1.2
A5
  Top 0.406: J2.A5 46.72,4.47 SJ2.2
A6  (via drill 0.6 pad 1.27)
  Top 0.406: R23.2 128.35,16.57 R16.1 128.5,16.5 v131,14 | U2.EMITTER 133.85,7.85 134.5,8.5 v136.5,8.5
  Bottom 0.406: J6.A1 138.56,6.43 v136.5,8.5 v131,14
A7  (via drill 0.6 pad 1.27)
  Top 0.406: F2.2 142.88,14.38 v142,13.5 | v125,23.5 R24.1 126.65,22.07 R17.1
  Bottom 0.406: v125,23.5 134,23.5 136.5,21 139.5,21 142,18.5 v142,13.5 141.1,12.61 J6.A2
A8  (via drill 0.6 pad 1.27)
  Top 0.406: J5.1 114,41.5 112,39.5 112,33 115.5,29.5 115.5,23.5 115,23 115,22 115.5,21.5 115.5,18.5 121.5,12.5 v127.5,12.5
  Bottom 0.406: J6.A0 136.03,4.98 128.5,12.5 v127.5,12.5
A9
  Top 0.406: J6.A5 148.72,4.47 SJ4.2
A10
  Top 0.406: J6.A4 146.19,4.48 SJ3.2
A11
  Bottom 0.406: J6.A3 143.65,6.14 149,11.5 149,19.5 147,21.5 RV2.P$2
A12  (via drill 0.6 pad 1.27)
  Top 0.406: R35.2 77.35,16.57 R28.1 77.5,16.5 v80,14 | U3.EMITTER 82.85,7.85 83.5,8.5 v85.5,8.5
  Bottom 0.406: J9.A1 87.56,6.43 v85.5,8.5 v80,14
A13  (via drill 0.6 pad 1.27)
  Top 0.406: F3.2 91.88,14.38 v91,13.5 | v74,23.5 R36.1 75.65,22.07 R29.1
  Bottom 0.406: v74,23.5 83,23.5 85.5,21 88.5,21 91,18.5 v91,13.5 90.11,12.61 J9.A2
A14  (via drill 0.6 pad 1.27)
  Top 0.406: J8.1 63,41.5 61,39.5 61,33 64.5,29.5 64.5,23.5 64,23 64,22 64.5,21.5 64.5,18.5 70.5,12.5 v76.5,12.5
  Bottom 0.406: J9.A0 85.03,4.98 77.5,12.5 v76.5,12.5
A15
  Top 0.406: J9.A5 97.72,4.47 SJ6.2
A16
  Top 0.406: J9.A4 95.19,4.48 SJ5.2
A17
  Bottom 0.406: J9.A3 92.64,6.14 98,11.5 98,19.5 96,21.5 RV3.P$2
A18  (via drill 0.51 pad 1.27, 0.6 pad 1.27)
  Top 0.406: v21.5,62.5 21.5,61 23,59.5 35.5,59.5 36.56,58.44 J12.A1 | v7.5,67.5 4.85,70.15 U4.EMITTER | v30,67.5 R40.1 26.92,69.93 R47.2
  Bottom 0.406: v7.5,67.5 v30,67.5 31.51,65.99 31.51,63.42 30.59,62.5 v21.5,62.5
A19  (via drill 0.51 pad 1.27)
  Top 0.406: R41.1 28,62.5 29.5,61 | v7.5,65 6.35,65 F4.2 | 29.5,61 30,60.5 37,60.5 39.11,58.39 J12.A2 | 29.5,61 v29.5,65 R48.1
  Bottom 0.406: v7.5,65 v29.5,65
A20  (via drill 0.51 pad 1.27)
  Top 0.406: J11.1 v44,74.5
  Bottom 0.406: v44,74.5 46.5,72 46.5,62 44.5,60 36.66,60 J12.A0
A21
  Top 0.406: SJ8.2 46.5,59 46.72,58.78 J12.A5
A22
  Top 0.406: SJ7.2 44,59 44.19,58.81 J12.A4
A23  (via drill 0.51 pad 1.27)
  Top 0.406: J12.A3 36,63 v33.5,63
  Bottom 0.406: RV4.P$2 26,75 33.5,67.5 v33.5,63
A24  (via drill 0.51 pad 1.27, 0.6 pad 1.27)
  Top 0.406: v72.5,62.5 72.5,61 74,59.5 86.5,59.5 87.56,58.44 J15.A1 | v58.5,67.5 55.85,70.15 U5.EMITTER | v81,67.5 R52.1 77.92,69.93 R59.2
  Bottom 0.406: v58.5,67.5 v81,67.5 82.51,65.99 82.51,63.42 81.59,62.5 v72.5,62.5
A25  (via drill 0.51 pad 1.27)
  Top 0.406: R53.1 79,62.5 80.5,61 | v58.5,65 57.35,65 F5.2 | 80.5,61 81,60.5 88,60.5 90.11,58.39 J15.A2 | 80.5,61 v80.5,65 R60.1
  Bottom 0.406: v58.5,65 v80.5,65
A26  (via drill 0.51 pad 1.27)
  Top 0.406: J14.1 v95,74.5
  Bottom 0.406: v95,74.5 97.5,72 97.5,62 95.5,60 87.66,60 J15.A0
A27
  Top 0.406: SJ10.2 97.5,59 97.72,58.78 J15.A5
A28
  Top 0.406: SJ9.2 95,59 95.19,58.81 J15.A4
A29  (via drill 0.51 pad 1.27)
  Top 0.406: J15.A3 87,63 v84.5,63
  Bottom 0.406: RV5.P$2 77,75 84.5,67.5 v84.5,63
A30  (via drill 0.51 pad 1.27, 0.6 pad 1.27)
  Top 0.406: v123.5,62.5 123.5,61 125,59.5 137.5,59.5 138.56,58.44 J18.A1 | v109.5,67.5 106.85,70.15 U6.EMITTER | v132,67.5 R64.1 128.92,69.93 R71.2
  Bottom 0.406: v109.5,67.5 v132,67.5 133.51,65.99 133.51,63.42 132.59,62.5 v123.5,62.5
A31  (via drill 0.51 pad 1.27)
  Top 0.406: R65.1 130,62.5 131.5,61 | v109.5,65 108.35,65 F6.2 | 131.5,61 132,60.5 139,60.5 141.1,58.39 J18.A2 | 131.5,61 v131.5,65 R72.1
  Bottom 0.406: v109.5,65 v131.5,65
A32  (via drill 0.51 pad 1.27)
  Top 0.406: J17.1 v146,74.5
  Bottom 0.406: v146,74.5 148.5,72 148.5,62 146.5,60 138.66,60 J18.A0
A33
  Top 0.406: SJ12.2 148.5,59 148.72,58.78 J18.A5
A34
  Top 0.406: SJ11.2 146,59 146.19,58.81 J18.A4
A35  (via drill 0.51 pad 1.27)
  Top 0.406: J18.A3 138,63 v135.5,63
  Bottom 0.406: RV6.P$2 128,75 135.5,67.5 v135.5,63
D1
  Top 0.406: J6.D2 143.65,47.64 142.5,46.5 142.5,43 | 142.5,43 140.25,40.75 SW2.B' | SW2.B 144.75,40.75 142.5,43
D2
  Top 0.406: J2.D2 41.64,47.64 40.5,46.5 40.5,43 | 40.5,43 38.25,40.75 SW1.B' | SW1.B 42.75,40.75 40.5,43
D3
  Top 0.406: J2.D3 39.11,50.61 36,47.5 32,47.5 30,45.5 30,42 29,41 29,31 28,30 R5.1 26.35,28.07 R2.1
D4  (via drill 0.6 pad 1.27)
  Top 0.406: v27,48.5 14,48.5 13.5,49 10.5,49 10,48.5 J4.2
  Bottom 0.406: J2.D4 36.56,49.06 36,48.5 v27,48.5
D5  (via drill 0.6 pad 1.27)
  Top 0.406: R4.1 v21.5,32.5 | R10.1 24.65,41.15 v25.5,42 27,42 28.5,43.5 28.5,45.5 31.5,48.5 33.5,48.5 34.03,49.03 J2.D5
  Bottom 0.406: v21.5,32.5 21.5,39.5 24,42 v25.5,42
D6
  Top 0.406: R1.1 26.35,44.07 R8.1 27,46 31.48,50.48 J2.D6
D7
  Top 0.406: R13.1 128.35,44.07 R19.1 129,46 133.49,50.48 J6.D6
D8  (via drill 0.6 pad 1.27)
  Top 0.406: v36.5,38.5 36.5,36.5 35.5,35.5 | 35.5,35.5 33,33 S2.2 | S2.5 38,33 35.5,35.5
  Bottom 0.406: J2.D8 25.13,47.36 27,45.5 32,45.5 36.5,41 v36.5,38.5
D9  (via drill 0.6 pad 1.27)
  Top 0.406: SG1.- 17.85,25.15 v17,26
  Bottom 0.406: J2.D9 22.59,48.59 17,43 v17,26
D10  (via drill 0.6 pad 1.27)
  Top 0.406: v138.5,38.5 138.5,36.5 137.5,35.5 | 137.5,35.5 135,33 S1.2 | S1.5 140,33 137.5,35.5
  Bottom 0.406: J6.D8 127.13,47.36 129,45.5 134,45.5 138.5,41 v138.5,38.5
D11  (via drill 0.6 pad 1.27)
  Top 0.406: SG2.- 119.85,25.15 v119,26
  Bottom 0.406: J6.D9 124.59,48.59 119,43 v119,26
D12  (via drill 0.6 pad 1.27)
  Top 0.406: v129,48.5 116,48.5 115.5,49 112.5,49 112,48.5 J5.2
  Bottom 0.406: J6.D4 138.56,49.06 138,48.5 v129,48.5
D13  (via drill 0.6 pad 1.27)
  Top 0.406: R18.1 v123.5,32.5 | R22.1 126.65,41.15 v127.5,42 129,42 130.5,43.5 130.5,45.5 133.5,48.5 135.5,48.5 136.03,49.03 J6.D5
  Bottom 0.406: v123.5,32.5 123.5,39.5 126,42 v127.5,42
D14
  Top 0.406: J6.D3 141.1,50.61 138,47.5 134,47.5 132,45.5 132,42 131,41 131,31 130,30 R20.1 128.35,28.07 R14.1
D15
  Top 0.406: J9.D2 92.64,47.64 91.5,46.5 91.5,43 | 91.5,43 89.25,40.75 SW3.B' | SW3.B 93.75,40.75 91.5,43
D16
  Top 0.406: R25.1 77.35,44.07 R31.1 78,46 82.48,50.48 J9.D6
D17  (via drill 0.6 pad 1.27)
  Top 0.406: v87.5,38.5 87.5,36.5 86.5,35.5 | 86.5,35.5 84,33 S3.2 | S3.5 89,33 86.5,35.5
  Bottom 0.406: J9.D8 76.14,47.36 78,45.5 83,45.5 87.5,41 v87.5,38.5
D18  (via drill 0.6 pad 1.27)
  Top 0.406: SG3.- 68.85,25.15 v68,26
  Bottom 0.406: J9.D9 73.59,48.59 68,43 v68,26
D19  (via drill 0.6 pad 1.27)
  Top 0.406: v78,48.5 65,48.5 64.5,49 61.5,49 61,48.5 J8.2
  Bottom 0.406: J9.D4 87.56,49.06 87,48.5 v78,48.5
D20  (via drill 0.6 pad 1.27)
  Top 0.406: R30.1 v72.5,32.5 | R34.1 75.65,41.15 v76.5,42 78,42 79.5,43.5 79.5,45.5 82.5,48.5 84.5,48.5 85.03,49.03 J9.D5
  Bottom 0.406: v72.5,32.5 72.5,39.5 75,42 v76.5,42
D21
  Top 0.406: J9.D3 90.11,50.61 87,47.5 83,47.5 81,45.5 81,42 80,41 80,31 79,30 R32.1 77.35,28.07 R26.1
D22
  Top 0.406: SW4.B' SW4.B 19,81.5 20.5,80 29,80 45.5,96.5 45.5,100.5 41.64,104.36 J12.D2
D23
  Top 0.406: R37.1 26.85,99.07 R43.1 28.35,103 30.5,103 31.48,103.98 J12.D6
D24
  Top 0.406: S4.5 11,97.5 8.5,100 | 8.5,100 8.5,101.5 10,103 24,103 25.13,104.14 J12.D8 | 8.5,100 6,97.5 S4.2
D25  (via drill 0.51 pad 1.27)
  Top 0.406: SG4.- v39.5,96.5
  Bottom 0.406: J12.D9 25.19,103.04 37.96,103.04 39.5,101.5 v39.5,96.5
D26  (via drill 0.51 pad 1.27)
  Top 0.406: J11.2 v42,76 | J12.D4 36.56,97.06 v36,96.5
  Bottom 0.406: v42,76 36,82 v36,96.5
D27
  Top 0.406: 29.5,98 29.5,101.5 30,102 33,102 34.03,103.03 J12.D5 | 29.5,98 29.5,87 28.9,86.4 25.68,86.4 R42.1 | R46.1 24.08,96.58 24.5,97 28.5,97 29.5,98
D28  (via drill 0.51 pad 1.27)
  Top 0.406: 26.9,85.01 R44.1 | R38.1 26.92,84.93 R44.1 | v42.5,96.5 31.5,85 R44.1
  Bottom 0.406: v42.5,96.5 42.5,102.23 J12.D3
D29
  Top 0.406: SW5.B' SW5.B 70,81.5 71.5,80 80,80 96.5,96.5 96.5,100.5 92.64,104.36 J15.D2
D30
  Top 0.406: R49.1 77.85,99.07 R55.1 79.35,103 81.5,103 82.48,103.98 J15.D6
D31
  Top 0.406: S5.5 62,97.5 59.5,100 | 59.5,100 59.5,101.5 61,103 75,103 76.14,104.14 J15.D8 | 59.5,100 57,97.5 S5.2
D32  (via drill 0.51 pad 1.27)
  Top 0.406: SG5.- v90.5,96.5
  Bottom 0.406: J15.D9 76.19,103.04 88.96,103.04 90.5,101.5 v90.5,96.5
D33  (via drill 0.51 pad 1.27)
  Top 0.406: J14.2 v93,76 | J15.D4 87.56,97.06 v87,96.5
  Bottom 0.406: v93,76 87,82 v87,96.5
D34
  Top 0.406: 80.5,98 80.5,101.5 81,102 84,102 85.03,103.03 J15.D5 | 80.5,98 80.5,87 79.9,86.4 76.68,86.4 R54.1 | R58.1 75.08,96.58 75.5,97 79.5,97 80.5,98
D35  (via drill 0.51 pad 1.27)
  Top 0.406: 77.9,85.01 R56.1 | R50.1 77.92,84.93 R56.1 | v93.5,96.5 82.5,85 R56.1
  Bottom 0.406: v93.5,96.5 93.5,102.23 J15.D3
D36
  Top 0.406: SW6.B' SW6.B 121,81.5 122.5,80 131,80 147.5,96.5 147.5,100.5 143.65,104.36 J18.D2
D37
  Top 0.406: R61.1 128.85,99.07 R67.1 130.35,103 132.5,103 133.49,103.98 J18.D6
D38
  Top 0.406: S6.5 113,97.5 110.5,100 | 110.5,100 110.5,101.5 112,103 126,103 127.13,104.14 J18.D8 | 110.5,100 108,97.5 S6.2
D39  (via drill 0.51 pad 1.27)
  Top 0.406: SG6.- v141.5,96.5
  Bottom 0.406: J18.D9 127.19,103.04 139.96,103.04 141.5,101.5 v141.5,96.5
D40  (via drill 0.51 pad 1.27)
  Top 0.406: J17.2 v144,76 | J18.D4 138.56,97.06 v138,96.5
  Bottom 0.406: v144,76 138,82 v138,96.5
D41
  Top 0.406: 131.5,98 131.5,101.5 132,102 135,102 136.03,103.03 J18.D5 | 131.5,98 131.5,87 130.9,86.4 127.68,86.4 R66.1 | R70.1 126.08,96.58 126.5,97 130.5,97 131.5,98
D42  (via drill 0.51 pad 1.27)
  Top 0.406: 128.9,85.01 R68.1 | R62.1 128.92,84.93 R68.1 | v144.5,96.5 133.5,85 R68.1
  Bottom 0.406: v144.5,96.5 144.5,102.23 J18.D3
GND  (via drill 0.6 pad 1.27)
  Top 0.406: 23.5,14.5 23.58,14.58 R6.2 24.65,17.57 R11.1 | F1.1 45.91,10.62 46.24,10.96 46.24,18.07 45.22,19.08 42.18,19.08
  other vias: 8,3.5 8.5,24.5 20,42 46,33.5 10,44 7.5,27 37.5,15 32,38 38,46 21,9.5 1,38.5 31.5,2.5
  pour Top (isolate 0.406): 47.8,53.1 1.2,53 0,51.8 0,7.2 7.1,0 47.8,0 49,1.3 49.06,4.9 49.06,37.9 49,40.5 49,51.9
  pour Bottom (isolate 0.406): 1.2,53 0,51.8 0,7.2 7.2,0 47.8,0 49.1,1.4 49.06,3.88 49.06,36.88 49,41 49,51.9 47.8,53.1
GND1  (via drill 0.6 pad 1.27)
  Top 0.406: 125.5,14.5 125.58,14.58 R16.2 126.65,17.57 R23.1 | F2.1 147.91,10.62 148.24,10.96 148.24,18.07 147.22,19.08 144.18,19.08
  other vias: 110,3.5 110.5,24.5 122,42 148,33.5 112,44 109.5,27 139.5,15 134,38 140,46 123,9.5 103,38.5 133.5,2.5
  pour Top (isolate 0.406): 149.8,53.1 103.2,53 102,51.8 102,7.2 109.1,0 149.8,0 151,1.3 151.06,4.9 151.06,37.9 151,40.5 151,51.9
  pour Bottom (isolate 0.406): 103.2,53 102,51.8 102,7.2 109.2,0 149.8,0 151.1,1.4 151.06,3.88 151.06,36.88 151,41 151,51.9 149.8,53.1
GND2  (via drill 0.6 pad 1.27)
  Top 0.406: 74.5,14.5 74.58,14.58 R28.2 75.65,17.57 R35.1 | F3.1 96.91,10.62 97.24,10.96 97.24,18.07 96.22,19.08 93.18,19.08
  other vias: 59,3.5 59.5,24.5 71,42 97,33.5 61,44 58.5,27 88.5,15 83,38 89,46 72,9.5 52,38.5 82.5,2.5
  pour Top (isolate 0.406): 98.8,53.1 52.2,53 51,51.8 51,7.2 58.1,0 98.8,0 100,1.3 100.06,4.9 100.06,37.9 100,40.5 100,51.9
  pour Bottom (isolate 0.406): 52.2,53 51,51.8 51,7.2 58.2,0 98.8,0 100.1,1.4 100.06,3.88 100.06,36.88 100,41 100,51.9 98.8,53.1
GND3  (via drill 0.51, 0.6 pad 1.27)
  Top 0.406: R40.2 25.15,68.57 R47.1 25.15,71.85 24.5,72.5 RV4.P$1 | F4.1 6.93,60.17 9.26,62.5 v11.53,62.5
  Bottom 0.813: v11.53,62.5 6.52,62.5 2.55,66.46 v2.55,67.99
  other vias: 33.5,97 34.5,83 36,70.5 31.5,57.5 8.5,70 31,97.5 8.5,94.5 17.5,62.5 28,76.5 26,72
  pour Top (isolate 0.406): 47.8,108.1 1.2,108 0,106.8 -0.1,62.3 7.2,55 47.8,55 49,56.2 49.06,59.9 49.06,92.9 49,95.5 49,106.9
  pour Bottom (isolate 0.406): 1.2,108 0,106.8 0,62.2 7.2,55 47.8,55 49,56.2 48.96,59.18 49.06,91.88 49,95.5 49,106.9 47.8,108
GND4  (via drill 0.51, 0.6 pad 1.27)
  Top 0.406: R52.2 76.15,68.57 R59.1 76.15,71.85 75.5,72.5 RV5.P$1 | F5.1 57.93,60.17 60.26,62.5 v62.53,62.5
  Bottom 0.813: v62.53,62.5 57.52,62.5 53.55,66.46 v53.55,67.99
  other vias: 84.5,97 85.5,83 87,70.5 82.5,57.5 59.5,70 82,97.5 59.5,94.5 68.5,62.5 79,76.5 77,72
  pour Top (isolate 0.406): 98.8,108.1 52.2,108 51,106.8 50.9,62.3 58.2,55 98.8,55 100,56.2 100.06,59.9 100.06,92.9 100,95.5 100,106.9
  pour Bottom (isolate 0.406): 52.2,108 51,106.8 51,62.2 58.2,55 98.8,55 100,56.2 99.96,59.18 100.06,91.88 100,95.5 100,106.9 98.8,108
GND5  (via drill 0.51, 0.6 pad 1.27)
  Top 0.406: R64.2 127.15,68.57 R71.1 127.15,71.85 126.5,72.5 RV6.P$1 | F6.1 108.93,60.17 111.26,62.5 v113.53,62.5
  Bottom 0.813: v113.53,62.5 108.52,62.5 104.55,66.46 v104.55,67.99
  other vias: 135.5,97 136.5,83 138,70.5 133.5,57.5 110.5,70 133,97.5 110.5,94.5 119.5,62.5 130,76.5 128,72
  pour Top (isolate 0.406): 149.8,108.1 103.2,108 102,106.8 101.9,62.3 109.2,55 149.8,55 151,56.2 151.06,59.9 151.06,92.9 151,95.5 151,106.9
  pour Bottom (isolate 0.406): 103.2,108 102,106.8 102,62.2 109.2,55 149.8,55 151,56.2 150.96,59.18 151.06,91.88 151,95.5 151,106.9 149.8,108
IOREF
  Top 0.406: 28,21 R7.2 26.35,21 R12.2 | U1.COLLECTOR 31.29,10.71
  Top 0.813: J2.IOREF 13.7,4.2 14.5,5 23.5,5 29.21,10.71 | 29.21,10.71 31.5,13 31.5,20 | 31.5,20 30.5,21 28,21 | RV1.P$3 37.5,24 36.5,23 34.5,23 31.5,20 | 31.29,10.71 29.21,10.71
IOREF1
  Top 0.406: 130,21 R17.2 128.35,21 R24.2 | U2.COLLECTOR 133.29,10.71
  Top 0.813: J6.IOREF 115.71,4.2 116.5,5 125.5,5 131.21,10.71 | 131.21,10.71 133.5,13 133.5,20 | 133.5,20 132.5,21 130,21 | RV2.P$3 139.5,24 138.5,23 136.5,23 133.5,20 | 133.29,10.71 131.21,10.71
IOREF2
  Top 0.406: 79,21 R29.2 77.35,21 R36.2 | U3.COLLECTOR 82.29,10.71
  Top 0.813: J9.IOREF 64.7,4.2 65.5,5 74.5,5 80.21,10.71 | 80.21,10.71 82.5,13 82.5,20 | 82.5,20 81.5,21 79,21 | RV3.P$3 88.5,24 87.5,23 85.5,23 82.5,20 | 82.29,10.71 80.21,10.71
IOREF3
  Top 0.406: R41.2 24.1,62.48 | R41.2 24,62.5 | R48.2 25.15,63.57 R41.2 | 7,76.5 U4.COLLECTOR | 22.5,64 22.58,64 R41.2
  Top 0.813: J12.IOREF 13.7,62.5 | 13.7,62.5 13.7,66 | 13.7,66 13.7,67.8 12,69.5 12,73.5 9,76.5 7,76.5 | 13.7,62.5 15.7,64.5 22,64.5 22.5,64 | RV4.P$3 20.5,77.5 19.5,76.5 19.5,68.5 18.5,67.5 15.2,67.5 13.7,66
IOREF4
  Top 0.406: R53.2 75.1,62.48 | R53.2 75,62.5 | R60.2 76.15,63.57 R53.2 | 58,76.5 U5.COLLECTOR | 73.5,64 73.58,64 R53.2
  Top 0.813: J15.IOREF 64.7,62.5 | 64.7,62.5 64.7,66 | 64.7,66 64.7,67.8 63,69.5 63,73.5 60,76.5 58,76.5 | 64.7,62.5 66.7,64.5 73,64.5 73.5,64 | RV5.P$3 71.5,77.5 70.5,76.5 70.5,68.5 69.5,67.5 66.2,67.5 64.7,66
IOREF5
  Top 0.406: R65.2 126.1,62.48 | R65.2 126,62.5 | R72.2 127.15,63.57 R65.2 | 109,76.5 U6.COLLECTOR | 124.5,64 124.58,64 R65.2
  Top 0.813: J18.IOREF 115.71,62.5 | 115.71,62.5 115.71,66 | 115.71,66 115.71,67.8 114,69.5 114,73.5 111,76.5 109,76.5 | 115.71,62.5 117.71,64.5 124,64.5 124.5,64 | RV6.P$3 122.5,77.5 121.5,76.5 121.5,68.5 120.5,67.5 117.21,67.5 115.71,66
N$1
  Top 0.406: LED2.2 122,36 122.5,35.5 125.53,35.5 R15.2 126.65,36.62 R21.2
N$2
  Top 0.406: R4.2 R3.1 26.35,35.62 R9.1 R10.2
N$3
  Top 0.406: LED1.2 20,36 20.5,35.5 23.53,35.5 R3.2 24.65,36.62 R9.2
N$4
  Top 0.406: R18.2 R15.1 128.35,35.62 R21.1 R22.2
N$5
  Top 0.406: LED2.3 122.25,37.75 124,39.5 124,43.5 124.5,44 R13.2 126.65,45.07 R19.2
N$6
  Top 0.406: LED2.1 120.75,34.25 121.5,33.5 121.5,31 124.5,28 R14.2 126.65,29.07 R20.2
N$7
  Top 0.406: LED3.2 71,36 71.5,35.5 74.53,35.5 R27.2 75.65,36.62 R33.2
N$8
  Top 0.406: LED1.3 20.25,37.75 22,39.5 22,43.5 22.5,44 R1.2 24.65,45.07 R8.2
N$9
  Top 0.406: LED1.1 18.75,34.25 19.5,33.5 19.5,31 22.5,28 R2.2 24.65,29.07 R5.2
N$10
  Top 0.406: R30.2 R27.1 77.35,35.62 R33.1 R34.2
N$11
  Top 0.406: LED3.3 71.25,37.75 73,39.5 73,43.5 73.5,44 R25.2 75.65,45.07 R31.2
N$12
  Top 0.406: LED3.1 69.75,34.25 70.5,33.5 70.5,31 73.5,28 R26.2 75.65,29.07 R32.2
N$13
  Top 0.406: R39.2 R45.2 24,94 23,93 20,93 19.5,93.5 LED4.2
N$14
  Top 0.406: R46.2 R45.1 25.78,92.19 R39.1 R42.2
N$15
  Top 0.406: R43.2 25.15,100.07 R37.2 24.08,98.08 22.5,96.5 22.5,95.5 22.3,95.3 LED4.3
N$16
  Top 0.406: R38.2 25.15,83.57 R44.2 23,85 22,86 22,89 17.75,93.25 LED4.1
N$17
  Top 0.406: R51.2 R57.2 75,94 74,93 71,93 70.5,93.5 LED5.2
N$18
  Top 0.406: R58.2 R57.1 76.78,92.19 R51.1 R54.2
N$19
  Top 0.406: R55.2 76.15,100.07 R49.2 75.08,98.08 73.5,96.5 73.5,95.5 73.3,95.3 LED5.3
N$20
  Top 0.406: R50.2 76.15,83.57 R56.2 74,85 73,86 73,89 68.75,93.25 LED5.1
N$21
  Top 0.406: R63.2 R69.2 126,94 125,93 122,93 121.5,93.5 LED6.2
N$22
  Top 0.406: R70.2 R69.1 127.78,92.19 R63.1 R66.2
N$23
  Top 0.406: R67.2 127.15,100.07 R61.2 126.08,98.08 124.5,96.5 124.5,95.5 124.3,95.3 LED6.3
N$24
  Top 0.406: R62.2 127.15,83.57 R68.2 125,85 124,86 124,89 119.75,93.25 LED6.1
SCL  (via drill 0.6 pad 1.27)
  Top 0.406: v4,7 J3.1 6.5,19 v7.5,20 | SJ2.1 46.7,6.8 46,7.5 41,7.5 v35,13.5
  Bottom 0.406: J2.SCL 2.27,8.73 v4,7 | v7.5,20 27.5,20 34,13.5 v35,13.5
SCL1  (via drill 0.6 pad 1.27)
  Top 0.406: v106,7 J1.1 108.5,19 v109.5,20 | SJ4.1 148.7,6.8 148,7.5 143,7.5 v137,13.5
  Bottom 0.406: J6.SCL 104.28,8.73 v106,7 | v109.5,20 129.5,20 136,13.5 v137,13.5
SCL2  (via drill 0.6 pad 1.27)
  Top 0.406: v55,7 J7.1 57.5,19 v58.5,20 | SJ6.1 97.7,6.8 97,7.5 92,7.5 v86,13.5
  Bottom 0.406: J9.SCL 53.28,8.73 v55,7 | v58.5,20 78.5,20 85,13.5 v86,13.5
SCL3  (via drill 0.51 pad 1.27)
  Top 0.406: J10.1 v44,65.5 44,64.01 46.5,61.51 SJ8.1
  Bottom 0.406: v44,65.5 44,66.7 42.7,68 40.5,68 9.5,99 7,99 2.27,103.22 J12.SCL
SCL4  (via drill 0.51 pad 1.27)
  Top 0.406: J13.1 v95,65.5 95,64.01 97.5,61.51 SJ10.1
  Bottom 0.406: v95,65.5 95,66.7 93.7,68 91.5,68 60.5,99 58,99 53.28,103.22 J15.SCL
SCL5  (via drill 0.51 pad 1.27)
  Top 0.406: J16.1 v146,65.5 146,64.01 148.5,61.51 SJ12.1
  Bottom 0.406: v146,65.5 146,66.7 144.7,68 142.5,68 111.5,99 109,99 104.28,103.22 J18.SCL
SDA  (via drill 0.6 pad 1.27)
  Top 0.406: J3.2 v8.5,9.5 v8.5,15.5 | v29.5,5.5 SJ1.1
  Bottom 0.406: J2.SDA 4.81,13.18 v8.5,9.5 | v8.5,15.5 18,15.5 28,5.5 v29.5,5.5
SDA1  (via drill 0.6 pad 1.27)
  Top 0.406: J1.2 v110.5,9.5 v110.5,15.5 | v131.5,5.5 SJ3.1
  Bottom 0.406: J6.SDA 106.81,13.18 v110.5,9.5 | v110.5,15.5 120,15.5 130,5.5 v131.5,5.5
SDA2  (via drill 0.6 pad 1.27)
  Top 0.406: J7.2 v59.5,9.5 v59.5,15.5 | v80.5,5.5 SJ5.1
  Bottom 0.406: J9.SDA 55.81,13.18 v59.5,9.5 | v59.5,15.5 69,15.5 79,5.5 v80.5,5.5
SDA3  (via drill 0.51 pad 1.27)
  Top 0.406: v42,72.5 J10.2 42,63.51 44,61.51 SJ7.1
  Bottom 0.406: J12.SDA 4.81,104.19 7,102 12.5,102 v42,72.5
SDA4  (via drill 0.51 pad 1.27)
  Top 0.406: v93,72.5 J13.2 93,63.51 95,61.51 SJ9.1
  Bottom 0.406: J15.SDA 55.81,104.19 58,102 63.5,102 v93,72.5
SDA5  (via drill 0.51 pad 1.27)
  Top 0.406: v144,72.5 J16.2 144,63.51 146,61.51 SJ11.1
  Bottom 0.406: J18.SDA 106.81,104.19 109,102 114.5,102 v144,72.5

## Text on the board
tPlace: switch | resistors 130R | switch | resistors 130R | switch | resistors 130R | on | LED | on | LED | on | LED | off | off | off | button | button | button | buzz | buzz | buzz | port2 | port2 | port2 | light | light | light | knob | knob | knob | 10K | 10K | 10K | port1 | port1 | port1 | temp | temp | temp | button | button | button | LED | LED | LED | port2 | switch | port2 | switch | port2 | switch | on | on | on | buzz | off | buzz | off | buzz | off | resistors 130R | resistors 130R | resistors 130R | knob | knob | knob | 10K | 10K | 10K | light | light | light | temp | temp | temp | port1 | port1 | port1
bPlace: Awesome Shield Prototype V0.51 / Awesome Shield UG / AwesomeShield.com | Awesome Shield Prototype V0.51 / Awesome Shield UG / AwesomeShield.com | Awesome Shield Prototype V0.51 / Awesome Shield UG / AwesomeShield.com | Hardware Designs released under the MIT License / opensource.org/licenses/MIT / github.com/awesomeshield/Awesome-Shield-PCB-0.5/ / 10c4d4f3bb515a6c994409b1e4d262171f185501 | Hardware Designs released under the MIT License / opensource.org/licenses/MIT / github.com/awesomeshield/Awesome-Shield-PCB-0.5/ / 10c4d4f3bb515a6c994409b1e4d262171f185501 | Hardware Designs released under the MIT License / opensource.org/licenses/MIT / github.com/awesomeshield/Awesome-Shield-PCB-0.5/ / 10c4d4f3bb515a6c994409b1e4d262171f185501 | Awesome Shield Prototype V0.50 / Awesome Shield UG / AwesomeShield.com | Awesome Shield Prototype V0.50 / Awesome Shield UG / AwesomeShield.com | Awesome Shield Prototype V0.50 / Awesome Shield UG / AwesomeShield.com | Hardware Designs Released under the MIT License / opensource.org/licenses/MIT / github.com/awesomeshield/Awesome-Shield-PCB-0.5/ / ded830142afc045dc4b4e3c480d7b3786a3a687c | Hardware Designs Released under the MIT License / opensource.org/licenses/MIT / github.com/awesomeshield/Awesome-Shield-PCB-0.5/ / ded830142afc045dc4b4e3c480d7b3786a3a687c | Hardware Designs Released under the MIT License / opensource.org/licenses/MIT / github.com/awesomeshield/Awesome-Shield-PCB-0.5/ / ded830142afc045dc4b4e3c480d7b3786a3a687c